# Altium PCB MIPI.PcbDoc
Units mil, origin at the board's own origin, x right, y up, seen from the top; angles counter-clockwise.
Board outline 2086.61 x 1456.69 mil, 2 copper layers (TOP, BOTTOM); 90 components, 80 nets, 454 pads, 143 vias.
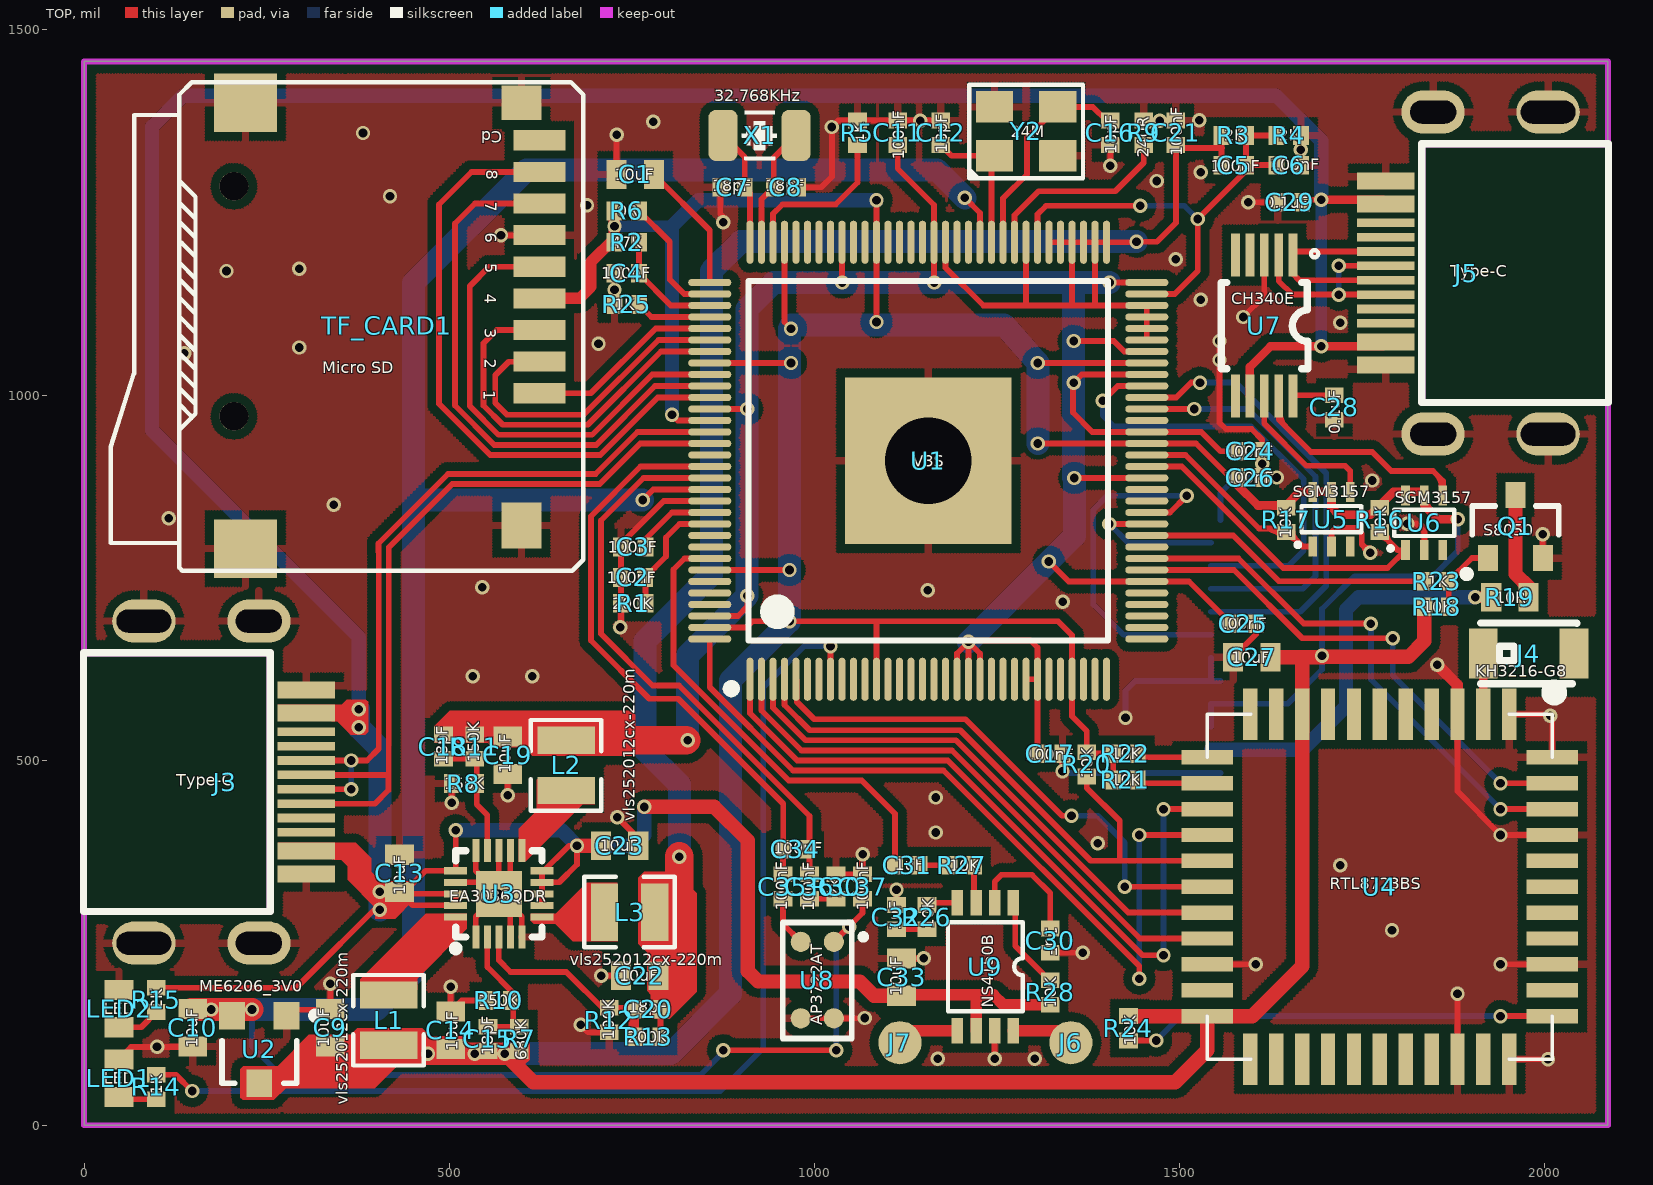
[diagram p0: TOP view]
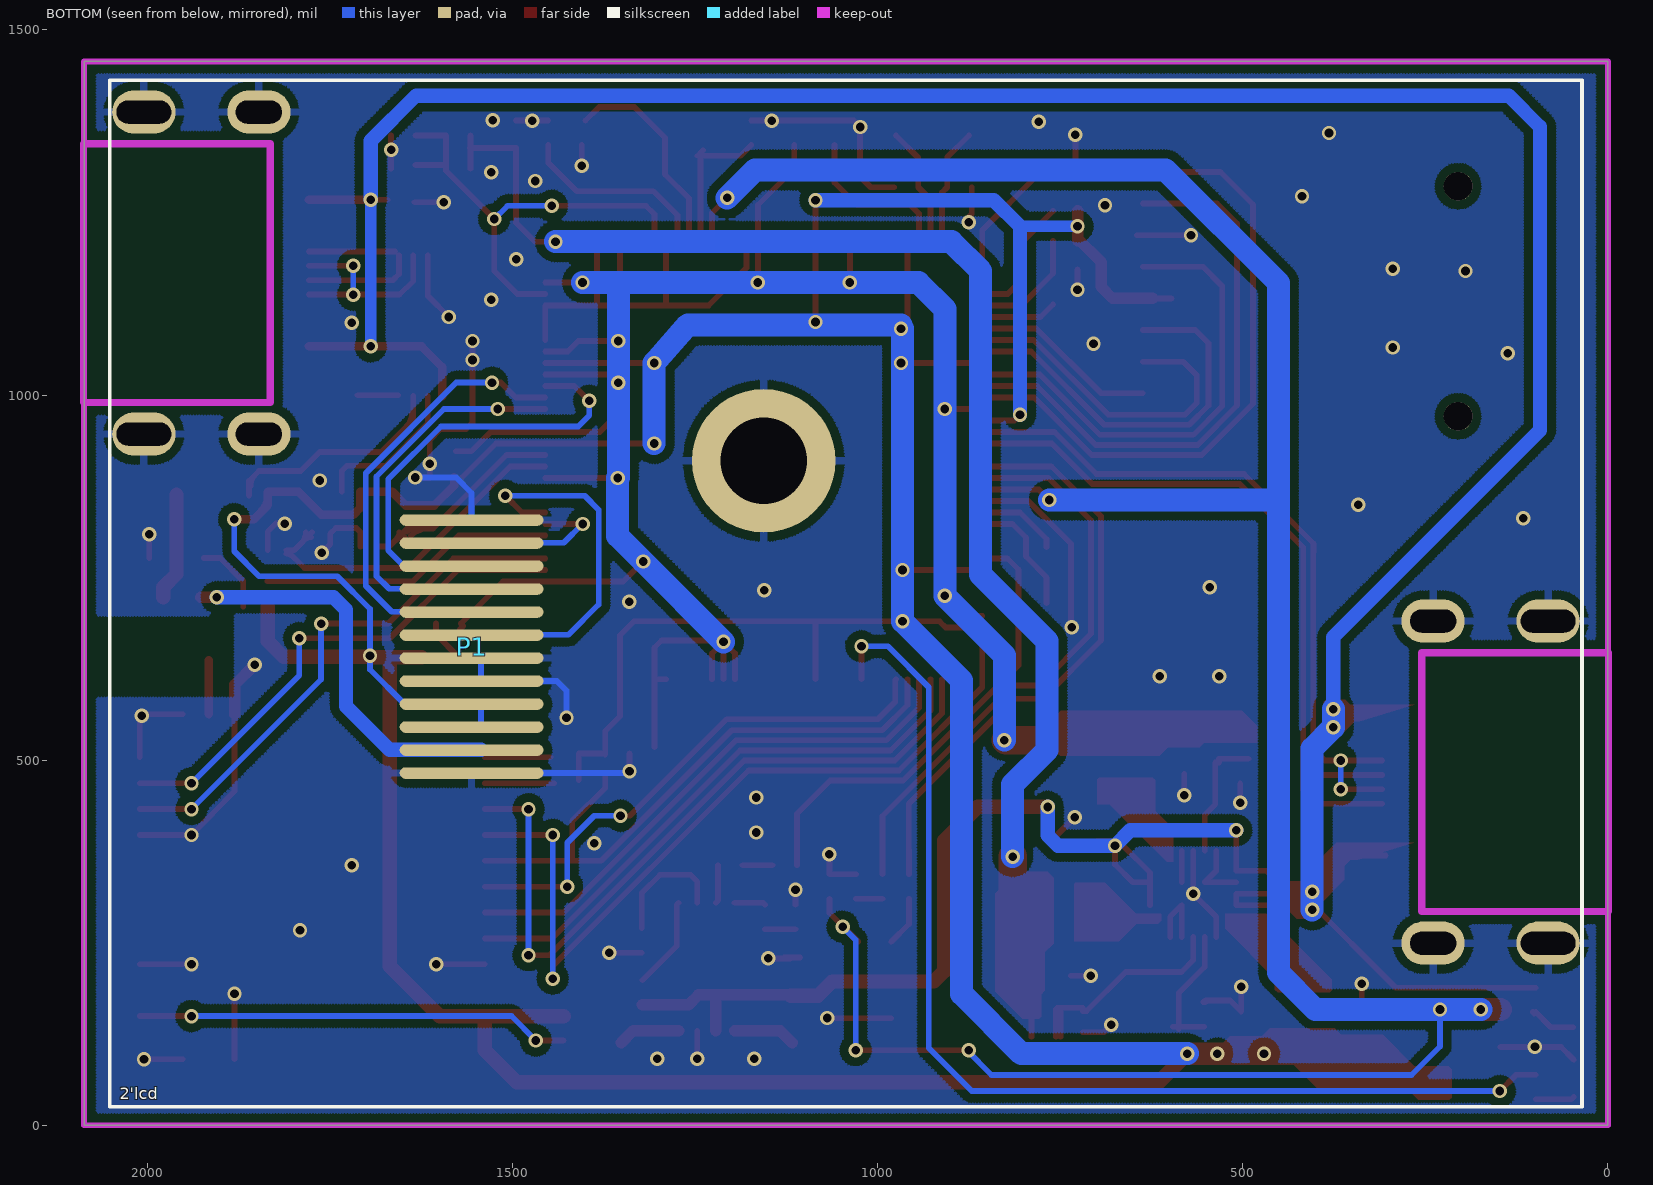
[diagram p1: BOTTOM view, seen from below]

## Layer stack, top to bottom
TOP: signal copper 1.4
Dielectric: core 12.6, FR-4, Dk 4.8
BOTTOM: signal copper 1.4

## Board outline
0,0 0,1456.69 2086.61,1456.69 2086.61,0

## Design rules (kind name [scope] priority, off if disabled: settings)
Clearance POLY [(INPolygon)] p1: gap=11.81
Clearance ALL [All] p2: gap=5.51
DiffPairsRouting DiffPair_DiffPairsRouting [InDifferentialPair ('NewDifferentialPair2')] p1: maxlimit=10 minlimit=10 mostfreqgap=10 maxuncoupledlength=500
DiffPairsRouting DiffPair_DiffPairsRouting_1 [InDifferentialPair ('NewDifferentialPair2')] p2: maxlimit=10 minlimit=10 mostfreqgap=10 maxuncoupledlength=500
DiffPairsRouting DiffPairsRouting_1 [InDifferentialPairClass('100RM')] p3: maxlimit=10 minlimit=10 mostfreqgap=10 maxuncoupledlength=500
DiffPairsRouting DiffPair_DiffPairsRouting_2 [InDifferentialPairClass('100RM')] p4: maxlimit=10 minlimit=10 mostfreqgap=10 maxuncoupledlength=500
DiffPairsRouting [All] p5: maxlimit=10 minlimit=5 mostfreqgap=10 toplayer_prefgap=5 bottomlayer_prefgap=5 maxuncoupledlength=500
HoleToHoleClearance [All] p1: gap=7.87 allowstackedmicrovias=TRUE
MatchedLengths DiffPair_MatchedLengths [InDifferentialPair ('NewDifferentialPair2')] p1: tolerance=1000 checknetsindiffpair=TRUE checkdiffpairvsdiffpair=TRUE checkothers=TRUE
MatchedLengths DiffPair_MatchedLengths_1 [InDifferentialPair ('NewDifferentialPair2')] p2: tolerance=1000 checknetsindiffpair=TRUE checkdiffpairvsdiffpair=TRUE checkothers=TRUE
MatchedLengths [InDifferentialPairClass('100RM')] p3: tolerance=1000 checknetsindiffpair=TRUE checkdiffpairvsdiffpair=TRUE checkothers=TRUE
MatchedLengths DiffPair_MatchedLengths_2 [InDifferentialPairClass('100RM')] p4: tolerance=1000 checknetsindiffpair=TRUE checkdiffpairvsdiffpair=TRUE checkothers=TRUE
MinimumSolderMaskSliver [All] p1: minsoldermaskwidth=7.87
PlaneClearance [All] p1: clearance=11.81
PlaneConnect [All] p1: planeconnectstyle=Direct reliefexpansion=20 reliefentries=4 reliefconductorwidth=10 reliefairgap=10
PolygonConnect [ISVIA] p1: connectstyle=Direct reliefconductorwidth=10 reliefentries=4 polygonreliefangle="90 Angle"
PolygonConnect POLY_ALL [All] p2: connectstyle=Relief reliefconductorwidth=10 reliefentries=4 polygonreliefangle="90 Angle"
RoutingVias [All] p1: holewidth=9.84 width=17.72 viastyle="Through Hole" minholewidth=7.87 minwidth=15.75 maxholewidth=19.68 maxwidth=31.5
SilkscreenOverComponentPads [All] p1: minsilkscreentomaskgap=10
SolderMaskExpansion [All] p1: expansion=4
TestPointUsage FabricationTestPointUsage [All] p1: valid=0 allowmultiple=FALSE
Testpoint FabricationTestpoint [(IsPad And (OnTopLayer Or OnBottomLayer))] p1: side=3 testpointundercomponent=TRUE minsize=40 maxsize=100 preferedsize=60 minholesize=0 maxholesize=40 preferedholesize=32 testpointgrid=1 style=297 order=0123456789
Width [All] p1: maxlimit=31.5 minlimit=5 preferedwidth=31.5
18 further rules are at their usual default settings.

## Components (designator, comment, footprint, x,y, rotation, side; value= is the part's Value field where it differs from the comment)
C1 "10uF" 0603 754.81,1302 r180 top
C2 "100nF" 0402 751.56,750.2 r0 top
C3 "100nF" 0402 752,792 r0 top
C4 "100nF" 0402 743,1166.67 r0 top
C5 "100nF" 0402 1574.32,1314.8 r180 top
C6 "100nF" 0402 1649.44,1314.8 r180 top
C7 "18pF" 0402 888,1284.5 r180 top
C8 "18pF" 0402 961,1284.5 r0 top
C9 "10uF" 0603 337,133.59 r90 top
C10 "10uF" 0603 149,133.59 r270 top
C11 "100nF" 0402 1114,1359 r270 top
C12 "18pF" 0402 1173,1359 r90 top
C13 "10uF" 0603 432,345 r270 top
C14 "10uF" 0603 502,130.22 r270 top
C15 "18pF" 0402 553,118.41 r270 top
C16 "18pF" 0402 1405,1359 r270 top
C17 "100nF" 0402 1323,509 r0 top
C18 "18pF" 0402 492.17,518.59 r90 top
C19 "10uF" 0603 580,506.78 r90 top
C20 "18pF" 0402 772.59,159 r0 top
C21 "100nF" 0402 1495,1359 r270 top
C22 "10uF" 0603 760.78,205 r0 top
C23 "10uF" 0603 733.22,383 r180 top
C24 "100nF" 0402 1596.54,923 r180 top
C25 "100nF" 0402 1587.19,687 r0 top
C26 "100nF" 0402 1596.54,887 r180 top
C27 "10uF" 0603 1599,641 r180 top
C28 "0.1uF" 0402 1712,983 r270 top
C29 "0.1uF" 0402 1651,1264 r0 top
C30 "1uF" 0402 1323,253 r270 top
C31 "1uF" 0402 1127.2,356.2 r180 top
C32 "1uF" 0402 1112.44,285.2 r90 top
C33 "10uF" 0603 1119.33,203 r90 top
C34 "100nF" 0402 974,378 r0 top
C35 "100nF" 0402 957,327 r90 top
C36 "100nF" 0402 993.33,327 r90 top
C37 "100nF" 0402 1066,327 r90 top
J3 "Type-C" USB-C-SMD_TYC-302-16 193.15,470 r270 top
J4 "KH3216-G8" ANT-SMD_L3.2-W1.6 1978,646 r0 top
J5 "Type-C" USB-C-SMD_TYC-302-16 1893.46,1167 r90 top
J6 "" TP-1.5 1351.2,113.2 r0 top
J7 "" TP-1.5 1117.2,113.2 r0 top
L1 "vls252012cx-220m" L1 417,144 r90 top
L2 "vls252012cx-220m" L1 660,493 r90 top
L3 "vls252012cx-220m" L1 747,292 r0 top
LED1 "LED" 0603 48,64.41 r90 top
LED2 "LED" 0603 48,160 r90 top
P1 "2'lcd" 2'LCD 1555.99,655.61 r0 bottom locked
Q1 "S8050" SOT23-3L 1960,820 r0 top
R1 "200K" 0402 752,715 r0 top
R2 "47K" 0402 743,1209.33 r0 top
R3 "2K" 0402 1574.32,1355.39 r180 top
R4 "2K" 0402 1649.44,1355.39 r180 top
R5 "1K" 0402 1059,1359 r270 top
R6 "0R" 0402 743,1252 r180 top
R7 "680K" 0402 596,118.41 r270 top
R8 "150K" 0402 520.24,468 r180 top
R9 "240R" 0402 1451,1359 r270 top
R10 "150K" 0402 567.76,171 r180 top
R11 "150K" 0402 535,518.59 r90 top
R12 "100K" 0402 719,144.24 r270 top
R13 "200K" 0402 772.59,121.24 r0 top
R14 "1K" 0402 99,52.6 r270 top
R15 "2K" 0402 99,171.81 r270 top
R16 "10K" 0402 1774,829 r270 top
R17 "10K" 0402 1646,829 r270 top
R18 "10K" 0402 1852,710 r0 top
R19 "10R" 0603 1952.41,723 r0 top
R20 "10K" 0402 1373,494.24 r270 top
R21 "10K" 0402 1426,473 r0 top
R22 "10K" 0402 1426,509 r0 top
R23 "1K" 0402 1852,745 r180 top
R24 "10K" 0402 1430,133 r90 top
R25 "1K" 0402 743,1124 r0 top
R26 "10K" 0402 1154.2,285.2 r270 top
R27 "10K" 0402 1201.7,356.2 r180 top
R28 "10K" 0402 1323,182 r270 top
R30 "2K" 0402 1029.67,327 r90 top
TF_CARD1 "Micro SD" "Micro SD" 220.98,1400 r270 top
U1 "V3S" LQFP-128 1156,910 r90 top
U2 "ME6206_3V0" SOT-23 240,109 r180 top
U3 "EA3036QDR" TQFN-20 568,317 r0 top
U4 "RTL8723BS" RTL8723BS 1538,563 r270 top
U5 "SGM3157" SOT363-6L 1708,830 r90 top
U6 "SGM3157" SOT363-6L 1835,825 r90 top
U7 "CH340E" MSOP-10 1616,1095 r180 top
U8 "AP3722AT" AP3722AT 1004,199 r0 top
U9 "NS4150B" MSOP8 1234.2,217.2 r270 top
X1 "32.768KHz" XT_3215_2 925,1355.5 r180 top
Y2 "24M" X3225 1290,1361 r0 top

## Footprints (in the part's own frame and the unit in brackets; to place one, negate y for a bottom-side part, rotate by r counter-clockwise, add the part's x,y. Pads: shape width x height; smd on the part's side, far side on the other; paste and mask are expansions set on the pad)
2'LCD [mm]
  oval 5x0.4 smd: 1(0,4.4) 2(0,3.6) 3(0,2.8) 4(0,2) 5(0,1.2) 6(0,0.4) 7(0,-0.4) 8(0,-1.2) 9(0,-2) 10(0,-2.8) 11(0,-3.6) 12(0,-4.4)
  silkscreen extent -38.62,-19.7 12.58,16
0402 [mm]
  rect 0.55x0.65 smd mask+0: 1(-0.425,0) 2(0.425,0)
0603 [mm]
  rect 0.7x1 smd mask+0: 1(-0.65,0) 2(0.65,0)
ANT-SMD_L3.2-W1.6 [mm]
  rect 1x1.75 smd: 1(-1.578,0) 2(1.578,0)
  silkscreen extent -1.68,-1.05 1.68,1.06
AP3722AT [mm]
  round 0.7 smd: 1(0.575,1.33) 2(0.575,-1.33) 3(-0.575,-1.33) 4(-0.575,1.33)
  silkscreen extent -1.2,-2.03 1.7,2
L1 [mm]
  rect 0.95x2 smd mask+0: 1(-0.875,0) 2(0.875,0)
  silkscreen extent -1.58,-1.22 1.58,1.23
LQFP-128 [mm]
  oval 1.5x0.25 smd: 1(-7.6,6.2) 2(-7.6,5.799) 3(-7.6,5.4) 4(-7.6,5.001) 5(-7.6,4.6) 6(-7.6,4.201) 7(-7.6,3.8) 8(-7.6,3.401) 9(-7.6,3) 10(-7.6,2.601) 11(-7.6,2.2) 12(-7.6,1.801) 13(-7.6,1.4) 14(-7.6,1.001) 15(-7.6,0.599) 16(-7.6,0.201) 17(-7.6,-0.201) 18(-7.6,-0.599) 19(-7.6,-1.001) 20(-7.6,-1.4) 21(-7.6,-1.801) 22(-7.6,-2.2) 23(-7.6,-2.601) 24(-7.6,-3) 25(-7.6,-3.401) 26(-7.6,-3.8) 27(-7.6,-4.201) 28(-7.6,-4.6) 29(-7.6,-5.001) 30(-7.6,-5.4) 31(-7.6,-5.799) 32(-7.6,-6.2) 65(7.6,-6.2) 66(7.6,-5.799) 67(7.6,-5.4) 68(7.6,-5.001) 69(7.6,-4.6) 70(7.6,-4.201) 71(7.6,-3.8) 72(7.6,-3.401) 73(7.6,-3) 74(7.6,-2.601) 75(7.6,-2.2) 76(7.6,-1.801) 77(7.6,-1.4) 78(7.6,-1.001) 79(7.6,-0.599) 80(7.6,-0.201) 81(7.6,0.201) 82(7.6,0.599) 83(7.6,1.001) 84(7.6,1.4) 85(7.6,1.801) 86(7.6,2.2) 87(7.6,2.601) 88(7.6,3) 89(7.6,3.401) 90(7.6,3.8) 91(7.6,4.201) 92(7.6,4.6) 93(7.6,5.001) 94(7.6,5.4) 95(7.6,5.799) 96(7.6,6.2)
  oval 0.25x1.5 smd: 33(-6.2,-7.6) 34(-5.799,-7.6) 35(-5.4,-7.6) 36(-5.001,-7.6) 37(-4.6,-7.6) 38(-4.201,-7.6) 39(-3.8,-7.6) 40(-3.401,-7.6) 41(-3,-7.6) 42(-2.601,-7.6) 43(-2.2,-7.6) 44(-1.801,-7.6) 45(-1.4,-7.6) 46(-1.001,-7.6) 47(-0.599,-7.6) 48(-0.201,-7.6) 49(0.201,-7.6) 50(0.599,-7.6) 51(1.001,-7.6) 52(1.4,-7.6) 53(1.801,-7.6) 54(2.2,-7.6) 55(2.601,-7.6) 56(3,-7.6) 57(3.401,-7.6) 58(3.8,-7.6) 59(4.201,-7.6) 60(4.6,-7.6) 61(5.001,-7.6) 62(5.4,-7.6) 63(5.799,-7.6) 64(6.2,-7.6) 97(6.2,7.6) 98(5.799,7.6) 99(5.4,7.6) 100(5.001,7.6) 101(4.6,7.6) 102(4.201,7.6) 103(3.8,7.6) 104(3.401,7.6) 105(3,7.6) 106(2.601,7.6) 107(2.2,7.6) 108(1.801,7.6) 109(1.4,7.6) 110(1.001,7.6) 111(0.599,7.6) 112(0.201,7.6) 113(-0.201,7.6) 114(-0.599,7.6) 115(-1.001,7.6) 116(-1.4,7.6) 117(-1.801,7.6) 118(-2.2,7.6) 119(-2.601,7.6) 120(-3,7.6) 121(-3.401,7.6) 122(-3.8,7.6) 123(-4.201,7.6) 124(-4.6,7.6) 125(-5.001,7.6) 126(-5.4,7.6) 127(-5.799,7.6) 128(-6.2,7.6)
  rect 5.8x5.8 smd: 129(0,0)
  silkscreen extent -8.07,-6.25 6.25,7
"Micro SD" [mm]
  rect 2.032x2.2 smd: 0(0,0) 0(15.5,0)
  rect 1.2x1.4 smd: 0(0,9.6)
  round 1 hole 1 unplated: 0(2.9,-0.4) 0(10.9,-0.4)
  rect 1.6x1.4 smd: 0(14.7,9.6)
  rect 0.7x1.8 smd: 1(10.1,10.227) 2(9,10.227) 3(7.9,10.227) 4(6.8,10.227) 5(5.7,10.227) 6(4.6,10.227) 7(3.5,10.227) 8(2.4,10.227) 9(1.3,10.227)
  silkscreen extent -0.72,-4.68 16.27,11.75
MSOP8 [mm]
  rect 0.9x0.4 smd mask+0: 1(-2.225,0.975) 2(-2.225,0.325) 3(-2.225,-0.325) 4(-2.225,-0.975) 5(2.225,-0.975) 6(2.225,-0.325) 7(2.225,0.325) 8(2.225,0.975)
  silkscreen extent -1.55,-1.3 1.55,1.3
MSOP-10 [mil]
  rect 12x59.06 smd: 1(-39.37,-96.5) 2(-19.68,-96.5) 3(0,-96.5) 4(19.69,-96.5) 5(39.37,-96.5) 6(39.37,96.5) 7(19.69,96.5) 8(0,96.5) 9(-19.68,96.5) 10(-39.37,96.5)
  silkscreen extent -74,-103 59,59
RTL8723BS [mm]
  rect 1.8x0.5 smd: 1(0,10.5) 2(0,9.6) 3(0,8.7) 4(0,7.8) 5(0,6.9) 6(0,6) 7(0,5.1) 8(0,4.2) 9(0,3.3) 10(0,2.4) 11(0,1.5) 23(12,1.5) 24(12,2.4) 25(12,3.3) 26(12,4.2) 27(12,5.1) 28(12,6) 29(12,6.9) 30(12,7.8) 31(12,8.7) 32(12,9.6) 33(12,10.5)
  rect 0.5x1.8 smd: 12(1.5,0) 13(2.4,0) 14(3.3,0) 15(4.2,0) 16(5.1,0) 17(6,0) 18(6.9,0) 19(7.8,0) 20(8.7,0) 21(9.6,0) 22(10.5,0) 34(10.5,12) 35(9.6,12) 36(8.7,12) 37(7.8,12) 38(6.9,12) 39(6,12) 40(5.1,12) 41(4.2,12) 42(3.3,12) 43(2.4,12) 44(1.5,12)
  silkscreen extent -0.95,0 12,12.26
SOT23-3L [mm]
  rect 0.7x0.9 smd: 1(-0.95,-1.1) 2(0.95,-1.1) 3(0,1.1)
  silkscreen extent -1.82,-1.78 1.5,0.71
SOT363-6L [mm]
  rect 0.7x0.3 smd: 1(-0.95,0.65) 2(-0.95,0) 3(-0.95,-0.65) 4(0.95,-0.65) 5(0.95,0) 6(0.95,0.65)
  silkscreen extent -0.97,-1.04 0.46,1.24
SOT-23 [mm]
  rect 0.9x0.95 smd: 1(-0.95,-1.048) 2(0.95,-1.048) 3(0,1.302)
  silkscreen extent -2.07,-1.17 1.3,1.3
TP-1.5 [mm]
  round 1.5 smd: 1(0,0)
TQFN-20 [mil]
  rect 9.84x31.49 smd: 1(-31.51,-59.05) 2(-15.76,-59.05) 3(-0.01,-59.05) 4(15.74,-59.05) 5(31.49,-59.05) 11(31.49,59.06) 12(15.74,59.06) 13(-0.01,59.06) 14(-15.76,59.06) 15(-31.51,59.06)
  rect 31.5x9.84 smd: 6(59.05,-31.5) 7(59.05,-15.75) 8(59.05,0) 9(59.05,15.75)
  rect 31.49x9.84 smd: 10(59.05,31.5) 16(-59.05,31.5) 17(-59.05,15.75) 18(-59.05,0) 19(-59.05,-15.75) 20(-59.05,-31.5)
  rect 63x63 smd: 21(-0.01,0)
  silkscreen extent -63,-79 59,59
USB-C-SMD_TYC-302-16 [mm]
  oval 1.5x2.2 hole 0.8 slot 1.6 at 90 deg: 0(-5.6,1.175) 0(5.6,1.175)
  rect 0.3x2 smd: 1(-3.35,2.825) 1(-3.05,2.825) 2(-2.55,2.825) 2(-2.25,2.825) 3(-1.75,2.825) 4(-1.25,2.825) 5(-0.75,2.825) 6(-0.25,2.825) 7(0.25,2.825) 8(0.75,2.825) 9(1.25,2.825) 10(1.75,2.825) 11(2.25,2.825) 11(2.55,2.825) 12(3.05,2.825) 12(3.35,2.825)
  oval 1.5x2.2 hole 0.8 slot 1.9 at 90 deg: 13(-5.6,-2.825) 13(5.6,-2.825)
  Keep-Out Layer lines w0.254: 4.5,-4.925 4.5,1.575 -4.5,1.575 -4.5,-4.925 4.5,-4.925
  silkscreen extent -4.5,-4.93 4.5,1.58
X3225 [mm]
  rect 1.3x1.1 smd mask+0: 1(-1.1,-0.85) 2(1.1,-0.85) 3(1.1,0.85) 4(-1.1,0.85)
  silkscreen extent -1.97,-1.63 1.97,1.63
XT_3215_2 [mil]
  rrect50% 40x70 smd: 1(-50,0) 2(50,0)
  silkscreen extent -24,-34 24,34

## Part data
C1 C2 C3 C4 C5 C6 C7 C8 C9 C10 C11 C12 C13 C14 C15 C16 C17 C18 C19 C20 C21 C22 C23 C24 C25 C26 C27 C28 C29 C30 C31 C32 C33 C34 C35 C36 C37: library part C
J3 J5: library part Type-C_12pin
J4 J6 J7: library part TEST-POINT, "测试点"
L1 L2 L3: library part L-CDRH, "功率屏蔽电感"
Q1: library part 8050-SMD, "高频放大-NPN型"
R1 R2 R3 R4 R5 R6 R7 R8 R9 R10 R11 R12 R13 R14 R15 R16 R17 R18 R19 R20 R21 R22 R23 R24 R25 R26 R27 R28 R30: library part R
TF_CARD1: "Micro SD卡"
U2: library part ME6206
U5 U6: "单路双掷模拟开关"
U7: "USB2UART"
X1: library part XTAL-2P, "2脚无源晶振"
Y2: library part "SMD XTAL"

## Free pads (board coordinates)
  round 196.85 hole 118.11: 0(1156,910)

## Via types
v1: diameter 19.68, hole 11.81, TOP to BOTTOM, tented both sides, 143 vias

## Nets (pads, with @x,y where several pads share a name; then routed paths per layer and width w, separated by ;. In a path a pad name is that pad's centre, name@x,y a point inside that pad or via, vN(x,y) a via of type N, cw(c..) or ccw(c..) an arc to the next point about the centre after c; other vN are vias at no path point)
+1.2V: C11.2 C17.1 C18.2 C19.2 C24.2 C25.1 L2.2 R11.2 U1.19 U1.20 U1.21 U1.25 U1.26 U1.38 U1.47 U1.51 U1.56 U1.58 U1.64 U1.80 U1.88 U1.108 U1.126 | length 3803.9
  TOP w7.87: C18.2 R11.2 652.13,535.32 L2.2 ; v1@826.55,525 v1@829,525 ; U1.126 895.38,697.4 907.98,710 v1(907.98,725) ; U1.108 v1(907.98,980.9) ; U1.88 1037.9,1158.02 1038,1157.92 v1(1038,1154.1) ; C11.2 1114,1310 1163.9,1260.1 U1.80 v1@1163.9,1154.1 ; U1.19 1195.4,646.28 v1(1211.1,661.98) ; U1.20 v1(1211.1,661.98) ; v1@1213.06,663.94 1296,663.94 1305.6,654.34 U1.26 ; U1.21 1226.9,646.18 v1(1211.1,661.98) ; U1.25 U1.26 ; C17.1@1305.6,517.67 U1.26 ; v1(1321,772) 1348.4,744.6 U1.38 1512.86,744.6 C25.1 ; v1@1354.01,1016.01 1354.01,975.99 1380.6,949.4 U1.51 1529.6,949.4 1556,923 C24.2@1577.54,923 ; v1(1355,1017) 1366.1,1028.1 U1.56 1424.12,1028.1 ; v1(1355,1074) 1410.02,1074 1424.42,1059.6 U1.58 ; v1(1356,886.4) U1.47 ; v1(1404.02,1154.1) U1.64 ; C25.1@1567.36,683.91 C25.1@1572.27,679
  TOP w39.37: L2.2 v1@824.1,527.45
  BOTTOM w7.87: v1(826.55,527.45) 829,525 v1@829,527.45 ; v1@1355,886.4 v1@1355,887.4
  BOTTOM w31.5: v1(826.55,527.45) 826.55,643.57 v1(907.98,725) v1(907.98,980.9) 907.98,1117.98 944.1,1154.1 v1(1038,1154.1) v1(1164,1154.1) 1355,1154.1 ; v1(1211.1,661.98) 1211.1,662.1 v1(1321,772) 1356,807 v1(1356,886.4) 1355,887.4 v1(1355,1017) v1(1355,1074) 1355,1154.1 ; v1(1404.02,1154.1) 1355,1154.1
+1.8V: C5.2 C20.2 C21.2 C22.2 L3.2 R3.2 R13.2 U1.59 U1.60 U1.61 U1.62 U1.65 U1.66 U1.67 U1.68 U1.69 U1.70 U1.72 U1.79 | length 2748.4
  TOP w7.87: L3.2@787.59,285.86 786.37,284.64 C22.2 789.32,202.05 C20.2 R13.2 ; U1.79 1179.6,1174.4 1231.4,1122.6 U1.62 U1.61 U1.60 U1.59 ; 1289.9,1122.6 U1.72 ; U1.70 U1.69 U1.68 ; 1352.9,1122.6 U1.68 ; 1384.3,1122.6 U1.66 ; C5.2@1557.59,1309.8 R3.2 ; 1558,1338.27 1495,1338.27 1495,1236 1469,1210 v1(1441,1210) 1440.2,1209.2 U1.65 U1.66 ; U1.68 U1.67 U1.66
  TOP w39.37: L3.2 815,325.55 v1(815,368)
  BOTTOM w31.5: v1(815,368) 815,467 768,514 768,663 859,754 859,1170 899,1210 v1(1441,1210)
+3.0V: C10.1 C37.1 U1.76 U1.115 U2.2 U8.1 | length 3769.5
  TOP w7.87: v1(765,856.2) 779.4,870.6 U1.115 ; v1(875,103) v1(1030,103) ; U8.1 1066,290.72 C37.1 ; v1(1206,1270) 1226.9,1249.1 U1.76
  TOP w31.5: C10.1@147,158.59 v1(174,158.59) v1(230,158.59)
  BOTTOM w7.87: v1(230,158.59) 230,108 269,69 844,69 878,103 v1(875,103) ; v1(1030,103) 1030,254 v1(1048,272)
  BOTTOM w31.5: v1(174,158.59) v1(230,158.59) 400.59,158.59 451,209 451,1153.34 605.66,1308 1168,1308 v1(1206,1270) ; 461.2,856.2 v1(765,856.2)
+3.3V: C9.1 C14.2 C15.2 C26.2 C27.1 L1.1 P1.3 P1.4 R2.1 R6.2 R7.2 R16.1 R17.1 R18.1 R20.1 R21.1 R22.1 R24.2 TF_CARD1.4 U1.12 U1.29 U1.50 U1.57 U1.85 U1.93 U1.104 U1.109 U1.122 U1.127 U2.3 U4.9 U4.22 U5.5 U5.6 U6.5 U6.6 | length 7451
  TOP w7.87: TF_CARD1.4@597.64,1132.28 TF_CARD1.4 ; v1(805,973.02) 812.92,965.1 U1.109 U1.109@831.2,965.1 ; U1.127 906.7,681.7 915.1,690.1 v1(966,690.1) 1085.1,690.1 ; U1.122 v1(966,760.4) ; U1.104 v1(968,1043.9) ; U1.93 959.1,1099.9 v1(968,1091) ; U1.12 1085.1,690.1 ; v1@1085.1,1100 U1.85 v1(1085.1,1266.9) ; v1(1306,933.6) U1.50 1522.4,933.6 C26.2@1569,887 ; v1(1306,1043.9) U1.57 ; R20.1@1373,507.73 1374.27,509 R22.1 R21.1 ; R20.1 1373,540 1352.9,560.1 U1.29 1352.9,671.1 1333.9,690.1 1085.1,690.1 ; R18.1 R18.1@1838,707.27
  TOP w11.81: C26.2 1579.8,876.2 1607.27,848.73 1646,848.73 1664.67,867.4 U5.6 U5.5 1708,846 1718,836 1761.47,836 1792.87,867.4 1835,867.4 1835,849 1854,830 v1(1881,830) ; U6.5@1835,859.53 ccw(c1860.42,859.53) 1842.44,841.56
  TOP w15.75: TF_CARD1.4 678.28,1132.28 694,1148 694,1182 726.27,1214.27 v1(726.27,1231) ; R2.1@726.27,1211 v1(726.27,1231) ; R6.2 v1(726.27,1231)
  TOP w19.68: v1(576,98.27) 615.27,59 1494,59 1538,103 U4.22 ; R24.2@1430,149.61 U4.22 ; C27.1 1667.92,641 ; v1(1695,643) v1@1696.59,641.41 ; R18.1 1835.27,663.27 1813.41,641.41 v1@1696.59,641.41 ; U4.22 1599.61,149.61 1667.92,217.92 U4.9 1667.92,641 ; 1667.92,641 1697,641 v1@1696.59,641.41
  BOTTOM w7.87: P1.3@1543,545.76 1543,577.26 1648.26,577.26 1695,624 v1(1695,643) 1695,707.21 1739.79,752 1847,752 1881,786 v1(1881,830)
  BOTTOM w15.75: v1(726.27,1231) 805,1231
  BOTTOM w19.68: v1(805,973.02) 805,1231 840.9,1266.9 v1(1085.1,1266.9)
  BOTTOM w31.5: v1(576,98.27) 803.27,98.27 885,180 885,609.1 v1(966,690.1) v1(966,760.4) v1@966,1091 ; v1@968,1096 1259.9,1096 v1(1306,1043.9) v1(1306,933.6)
  other v1: 471,98.27 535,98.27 1085,1100
+5V: C13.2 C23.2 C29.2 C33.1 J3.2 J3.11 J5.2 J5.11 R15.1 R28.2 U3.7 U3.8 U3.9 U3.10 U3.16 U3.18 U3.19 U7.7 U9.6 | length 5764.8
  TOP w7.87: R15.1 290.54,188.54 C13.2@413.5,311.5 ; J3.11@304.37,369.61 365.39,369.61 370,365 370,340 390,320 v1(405,320) 382,343 382,369 369.58,381.42 J3.11@309.22,381.42 ; C13.2 450.16,301.25 U3.19 U3.18 C13.2@438.41,317 ; C13.2@438.41,319.41 467.5,348.5 U3.16 v1(508.95,403.94) ; U3.7 U3.8 U3.9 ; C29.2@1671.12,1267.39 v1(1694,1267.39) ; U3.9 650.75,332.75 675,357 v1(675,383) 664,383 627.05,346.06 U3.9
  TOP w11.81: U7.7 1596.31,1038.31 1624.61,1066.61 v1(1694,1066.61) J5.2@1778.78,1066.61 ; v1(1694,1267.39) J5.11@1778.78,1267.39
  TOP w15.75: C33.1@1119.33,178.61 1221.41,178.61 ; U9.6 1221.41,178.61 ; R28.2@1322,165.27 1258.73,165.27 1245.39,178.61 1221.41,178.61
  TOP w19.68: v1(675,383) C23.2@699.41,383 ; v1(767,436) 863,436 909,390 909,211 923,197 1062,197 1081.59,177.41 C33.1
  BOTTOM w15.75: v1(1694,1066.61) v1(1694,1267.39)
  BOTTOM w19.68: v1(376,570) 376,668.59 93,951.59 93,1367.1 135.93,1410.03 1631.97,1410.03 1694,1347.99 v1(1694,1267.39) ; v1(508.95,403.94) 654.05,403.94 v1(675,383) 753,383 767,397 v1(767,436)
  BOTTOM w31.5: v1(376,570) v1(376,545) 405,516 v1(405,320) v1(405,295)
CH340_RXD: U6.4 U7.9 | length 349.4
  TOP w7.87: U7.9 1635.68,966.32 1680,922 1764,922 1790,896 1847,896 1860.59,882.41 U6.4 ; U7.9@1637.74,974.97 ccw(c1663.61,974.97) 1645.32,956.68 ; 1852.19,890.81 cw(c1836.65,875.28) U6.4@1858.62,875.28
CH340_TXD: U5.4 U7.8 | length 210.9
  TOP w7.87: U7.8 1616,961 1674,903 1727,903 1733.59,896.41 U5.4
D+: J5.6 J5.8 U7.1 | length 271.2
  TOP w7.87: U7.1 1655.37,1165.63 1663.84,1157.16 J5.6@1778.78,1157.16 ; U7.1@1660.4,1196.53 J5.8@1778.78,1196.53
D-: J5.5 J5.7 U7.2 | length 286.1
  TOP w7.87: U7.2 1635.68,1156.32 1654.53,1137.47 v1(1718.16,1137.47) J5.5@1778.78,1137.47 ; v1(1718.16,1176.84) J5.7@1778.78,1176.84
  BOTTOM w7.87: v1(1718.16,1137.47) v1(1718.16,1176.84)
GND: C1.2 C2.1 C3.1 C4.1 C6.1 C7.2 C8.2 C9.2 C10.2 C11.1 C12.2 C13.1 C14.1 C16.2 C17.2 C19.1 C21.1 C22.1 C23.1 C24.1 C25.2 C26.1 C27.2 C28.2 C29.1 C30.2 C32.2 C33.2 C37.2 J3.0 J3.1 J3.12 J3.13 J5.0 J5.1 J5.12 J5.13 LED1.2 LED2.2 P1.1 P1.5 P1.6 P1.12 pad.0 Q1.2 R1.1 R4.1 R5.1 R8.2 R9.1 R10.2 R12.2 R25.1 R30.2 TF_CARD1.0@220.98,789.76 TF_CARD1.0@220.98,1400 TF_CARD1.0@598.94,821.26 TF_CARD1.0@598.94,1400 TF_CARD1.6 U1.116 U1.129 U2.1 U3.1 U3.4 U3.5 U3.12 U3.13 U3.15 U3.17 U3.21 U4.1 U4.3 U4.20 U4.31 U4.33 U4.36 U4.41 U4.44 U5.2 U6.2 U7.3 U8.2 U8.3 U9.7 Y2.2 Y2.4 | length 3976.9
  TOP w7.87: LED1.2@47,90 47.5,90.5 64.41,107.41 C10.2@147,107.41 ; U2.1@275.4,158.26 334.67,158.26 C9.2@335,158.59 ; C9.2 v1(337,194) ; v1(502,190) C14.1 517.19,171 R10.2 ; v1(503.5,441.5) R8.2 ; U3.17 552.24,332.75 536.49,348.5 U3.15 ; U3.1 536.49,285.5 v1(567.99,317) U3.13 ; R10.2@551.03,169 R10.2@554.27,169 ; v1(571,1218.9) TF_CARD1.6 ; v1(580,452) C19.1 ; U3.4 583.74,301.25 599.49,285.5 U3.5 ; U3.21@583.74,332.75 U3.12 ; TF_CARD1.6@597.64,1218.9 TF_CARD1.6 ; TF_CARD1.6@644.9,1218.9 TF_CARD1.6 ; v1(680,138) 690.5,127.5 R12.2 ; v1(708,205) C22.1 ; v1(726.27,1144.27) C4.1@726.27,1172 ; C1.2@728,1302 C1.2 v1(729.22,1356.22) ; v1(730,422) 758.81,393.19 C23.1 ; v1@735.27,683.27 R1.1 C3.1 735.27,796.27 793.9,854.9 U1.116 ; C7.2 871.27,1247.73 878,1241 875,1238 v1(875,1236.8) ; C8.2 1009.5,1284.5 1024,1299 v1(1024,1367) 1032.73,1375.73 R5.1 C11.1 C12.2 ; U8.3 U8.2 v1@1068.64,146.64 ; R30.2 C37.2 v1(1066,371) ; C33.2@1106.2,229.8 C33.2@1127.8,229.8 ; C32.2 v1(1112.44,322.44) ; C33.2 v1(1149.82,228.59) ; v1(1247,91.13) U9.7 ; C30.2 v1(1367.45,236.27) ; v1(1339.73,484.73) C17.2 ; v1(1405,1314) C16.2 ; R9.1 C21.1 ; U4.20 v1(1604.48,220.48) ; v1(1554.76,1074) 1554.76,962.06 1563.49,953.33 1598.7,953.33 1613.27,938.77 C24.1 ; C27.2 1604.73,672.32 C25.2@1604.73,687 ; v1(1587,1106.88) 1616,1135.88 U7.3 ; v1(1594,1264) C29.1 ; C24.1@1613.27,920.73 C26.1 v1(1633,887) ; C6.1@1666.17,1309.8 R4.1 ; U5.2 1708,812 1714,818 1741.79,818 1749.34,810.45 1749.34,795.66 v1(1761,784) ; v1@1755.09,784 ccw(c1740.84,784) 1750.92,794.08 ccw(c1761,804.16) v1@1761,789.91 ; v1(1812,824) 1824,824 1835,813 U6.2 ; U4.31 v1(1880.52,180) ; U4.3 1880.52,457.48 v1(1939.48,397.65) U4.41 ; v1(1939.48,220.48) U4.36 ; U4.33 v1(2004.44,90.56) ; U4.1 2005,563 2010.44,557.56 U4.44 ; Q1.2 v1(1997.4,809.6)
  TOP w15.75: v1(1853,630.5) 1880.52,602.98 U4.3
  BOTTOM w7.87: v1(1339.73,484.73) 1342.09,482.38 P1.1 ; v1(1426,558) 1426,595 1439.36,608.36 P1.5 ; P1.5@1543,608.76 P1.6@1543,640.25 ; P1.12 1555.99,865.99 1577,887 v1(1633,887)
  other v1: 1169,91.13 1302,91.13 100,107.41 1069,147 1790.98,267 1720.11,356 1388,386.41 1166,401 1166,449 2007.51,561 532,614.75 613.81,615 734,682 1340,717.11 1155,732.86 545,736.8 116,831.29 342.16,850 1764,883 1613.27,906 1554.76,1048 137.44,1057 294.92,1065 704.36,1070 1720.11,1099 1529,1130.5 195,1169.87 294.92,1173 1495,1186 688.62,1260 419,1272.23 1469,1293 1529,1305 1666.17,1336 382,1358.84 779.17,1374 1145,1375.73 1473,1375.73 1527.2,1376
HPOUTL: C31.2 U1.121 | length 645.1
  TOP w7.87: U1.121 822.1,776.1 807,761 807,630 964.9,472.1 1064.9,472.1 1110.47,426.53 C31.2
HPOUTR: U1.120
LCD_BK: P1.2 R19.1 | length 547.6
  TOP w15.75: v1(1905,723) R19.1
  BOTTOM w19.68: P1.2@1543,514.27 1668.27,514.27 1728,574 1728,706 1745,723 v1(1905,723)
LCD_BL: R23.2 U1.42 | length 496.2
  TOP w7.87: 1545.4,807.6 U1.42 1573.4,807.6 1636,745 R23.2
LCD_DC: P1.7 U1.44 | length 508.2
  TOP w7.87: U1.44 1487.1,839.1 v1(1510,862)
  BOTTOM w7.87: v1(1510,862) 1401,862 1382,843 1382,713 1423.25,671.75 P1.7@1543,671.75
LCD_RES: P1.11 U1.43 | length 200.8
  TOP w7.87: v1(1404,823.4) U1.43
  BOTTOM w7.87: v1(1404,823.4) 1429.67,797.73 P1.11@1543,797.73
LED1: R14.1 U1.8 | length 1519
  TOP w7.87: R14.1 125.67,69.33 v1(148,47) ; U1.8 v1(1022.1,655.9)
  BOTTOM w7.87: v1(148,47) 871,47 930,106 930,600 985.9,655.9 v1(1022.1,655.9)
MICIN1N: C34.2 C36.2 U1.114 | length 797.1
  TOP w7.87: U1.114 765.89,886.4 707.78,828.29 707.78,673.15 778.54,602.39 814.61,602.39 993.33,423.67 C36.2
MICIN1P: C34.1 C35.2 U1.113 | length 813.2
  TOP w7.87: U1.113 762.1,902.1 694,834 694,664 774,584 813.51,584 957.27,440.25 C34.1 ; C35.2 C34.1@957,377.73
NetC7_1: C7.1 U1.96 X1.2 | length 161.6
  TOP w7.87: X1.2 904.73,1325.77 C7.1 911.9,1277.33 U1.96
NetC8_1: C8.1 U1.95 X1.1 | length 165.9
  TOP w7.87: U1.95 927.7,1267.93 C8.1 944.27,1324.77 X1.1
NetC15_1: C15.1 R7.1 R10.1 U3.2 | length 183.6
  TOP w7.87: U3.2 552.24,216.76 587.73,181.27 R7.1@587.73,132 ; C15.1 R7.1
NetC18_1: C18.1 R8.1 R11.1 U3.14 | length 172.2
  TOP w7.87: C18.1 R11.1@532.61,501.86 ; R11.1@532.61,496.71 537.76,496.71 537.76,439.24 552.24,424.76 U3.14
NetC20_1: C20.1 R12.1 R13.1 U3.3 | length 322.5
  TOP w7.87: U3.3 567.99,226.01 584,210 660.39,210 713.83,156.56 R12.1@719,156.56 ; R12.1 753.89,160.97 C20.1 R13.1 ; R13.1@749.71,121.24 C20.1@749.71,156.56
NetC28_1: C28.1 U7.10 | length 55.4
  TOP w7.87: U7.10@1656.6,999.73 C28.1
NetC30_1: C30.1 U9.2 | length 167.5
  TOP w7.87: U9.2 1247,334 1256,343 1298,343 1323,318 C30.1
NetC31_1: C31.1 R27.2 | length 41
  TOP w7.87: C31.1 R27.2
NetC32_1: C32.1 R26.2 | length 41.8
  TOP w7.87: C32.1 R26.2
NetC35_1: C35.1 U8.4 | length 69
  TOP w7.87: C35.1 957,275.72 U8.4
NetC36_1: C36.1 R30.1 | length 36.3
  TOP w7.87: C36.1 R30.1
NetJ4_1: J4.1 U4.2 | length 74
  TOP w11.81: U4.2 J4.1@1915.95,636.95
NetJ6_1: J6.1 U9.8 | length 85.4
  TOP w15.75: U9.8 1334.8,129.61 J6.1
NetJ7_1: J7.1 U9.5 | length 85.4
  TOP w15.75: J7.1 1133.61,129.61 U9.5
NetL1_2: L1.2 U3.20 | length 145.1
  TOP w7.87: L1.2 508.95,270.39 U3.20
NetL2_1: L2.1 U3.11 | length 107.6
  TOP w7.87: U3.11 660,436.56 L2.1
NetL3_1: L3.1 U3.6 | length 79
  TOP w7.87: U3.6 L3.1@706.05,285.5
NetLED1_1: LED1.1 R14.2 | length 53.2
  TOP w7.87: LED1.1@47,38.82 49.95,35.87 R14.2
NetLED2_1: LED2.1 R15.2 | length 62.4
  TOP w7.87: LED2.1 78.33,134.41 R15.2 ; R15.2@101,153.08 R15.2@103,155.08
NetQ1_1: Q1.1 R18.2 R23.1 | length 102
  TOP w7.87: R18.2 R23.1 1900.42,776.69 Q1.1
NetQ1_3: Q1.3 R19.2 | length 147.8
  TOP w19.68: Q1.3 1960,755 1978,737 R19.2
NetR5_2: R5.2 U1.94 | length 223.6
  TOP w7.87: U1.94 943.4,1248.17 956.23,1261 1006,1261 1029,1261 1059,1291 R5.2
NetR21_2: R21.2 U4.13 | length 130.3
  TOP w7.87: R21.2@1443.22,468.51 U4.13 1502.51,468.51
NetR22_2: R22.2 U4.12 | length 130.3
  TOP w7.87: R22.2@1447.79,503.94 U4.12 1497.94,503.94
NetR24_1: R24.1 U4.34 | length 597.3
  TOP w7.87: R24.1 v1(1468,116.27) ; v1(1939.48,149.61) U4.34
  BOTTOM w7.87: v1(1468,116.27) 1501.35,149.61 v1@1942.49,149.61
NetR25_2: R25.2 U1.100 | length 104.2
  TOP w7.87: R25.2 776.83,1106.9 U1.100
NetR26_1: R26.1 U9.4 | length 42.8
  TOP w7.87: R26.1 1157.07,304.8 U9.4
NetR27_1: R27.1 U9.3 | length 52.6
  TOP w7.87: R27.1 1218.44,307.78 U9.3
NetR28_1: R28.1 U9.1 | length 126.5
  TOP w7.87: U9.1 1275,302.39 1275,245.73 R28.1@1322,198.73
RESET: C4.2 R2.2 U1.99 | length 159.9
  TOP w7.87: R2.2@759.73,1211 759.73,1166.27 803.4,1122.6 U1.99
SDC0_CLK: TF_CARD1.5 U1.105 | length 663.5
  TOP w7.87: TF_CARD1.5@637.01,1175.59 554.59,1175.59 528,1149 528,984.97 567.53,945.44 695.49,945.44 778.15,1028.1 U1.105
SDC0_CMD: TF_CARD1.3 U1.103 | length 545.2
  TOP w7.87: TF_CARD1.3@637.01,1088.98 564.98,1088.98 547,1071 547,985.46 573.24,959.22 689.78,959.22 790.16,1059.6 U1.103
SDC0_D0: TF_CARD1.7 U1.106 | length 794.3
  TOP w7.87: TF_CARD1.7@637.01,1262.2 535.2,1262.2 508,1235 508,985.49 561.83,931.66 701.2,931.66 781.94,1012.4 U1.106
SDC0_D1: TF_CARD1.8 U1.107 | length 874.9
  TOP w7.87: TF_CARD1.8@637.01,1305.51 530.51,1305.51 486,1261 486,988 556.12,917.88 706.91,917.88 785.63,996.6 U1.107
SDC0_D2: TF_CARD1.1 U1.101 | length 256.5
  TOP w7.87: TF_CARD1.1@637.01,1002.36 693.95,1002.36 782.69,1091.1 U1.101
SDC0_D3: TF_CARD1.2 U1.102 | length 462.6
  TOP w7.87: TF_CARD1.2@637.01,1045.67 581.67,1045.67 563,1027 563,988.95 578.95,973 684.08,973 786.48,1075.4 U1.102
SDC1_CLK: U1.5 U4.17 | length 733.5
  TOP w7.87: U1.5 975.84,609.86 975.84,580.08 999.91,556 1207,556 1339,424 v1(1352,424) ; v1(1425,326.78) U4.17
  BOTTOM w7.87: v1(1352,424) 1388,424 1425,387 v1(1425,326.78)
SDC1_CMD: R20.2 U1.4 U4.16 | length 836.4
  TOP w7.87: U1.4 959.1,575.55 993.65,541 1199.72,541 1378.51,362.21 1418,362.21 ; R20.2 1373,462 1418,417 1418,362.21 ; U4.16 1418,362.21
SDC1_D0: U1.3 U4.18 | length 749.8
  TOP w7.87: U1.3 943.4,571.76 987.94,527.22 1194.01,527.22 1429.89,291.35 U4.18
SDC1_D1: U1.2 U4.19 | length 782.4
  TOP w7.87: U1.2 927.7,567.98 982.24,513.44 1188.31,513.44 1445.83,255.91 U4.19
SDC1_D2: U1.1 U4.14 | length 1009.9
  TOP w7.87: U1.1 911.9,564.29 976.53,499.66 1182.6,499.66 1449.26,233 v1(1478,233) ; v1(1478,433.08) U4.14
  BOTTOM w7.87: v1(1478,233) v1(1478,433.08)
SDC1_D3: U1.128 U4.15 | length 1118.9
  TOP w7.87: U1.128 856.8,599.9 970.82,485.88 1176.89,485.88 1445,217.77 v1(1445,201) ; v1(1445,397.65) U4.15
  BOTTOM w7.87: v1(1445,201) v1(1445,397.65)
SPI_CS: P1.8 U1.54 | length 637.4
  TOP w7.87: U1.54 1495.6,996.6 1516,1017 v1(1528,1017)
  BOTTOM w7.87: v1@1523,1017 1576.97,1017 1701,892.97 1701,739 1665.24,703.24 P1.8@1543,703.24
SPI_MISO: U1.52
SPI_MOSI: P1.10 U1.55 | length 633.3
  TOP w7.87: v1(1395,992) 1415.4,1012.4 U1.55
  BOTTOM w7.87: v1(1395,992) 1395,972 1410,957 1598,957 1670,885 1670,787 1649.24,766.24 P1.10@1543,766.24
SPI_SCLK: P1.9 U1.53 | length 559.7
  TOP w7.87: U1.53 v1(1520.1,980.9)
  BOTTOM w7.87: v1@1520.1,976.9 v1(1520.1,980.9) 1593.59,980.9 1686,888.49 1686,752 1668.74,734.74 P1.9@1543,734.74
SVREF: C5.1 C6.2 R3.1 R4.2 U1.63 U1.71 | length 649
  TOP w7.87: U1.71 1305.6,1247.6 1317,1259 v1(1446,1259) ; U1.63 1493.3,1138.3 1525,1170 v1(1525,1240.94) 1591.06,1307 C5.1 ; C6.2 C5.1 ; R4.2 R3.1 C5.1
  BOTTOM w7.87: v1(1446,1259) 1506.94,1259 v1(1525,1240.94)
SZQ: R9.2 U1.73 | length 267.8
  TOP w7.87: U1.73 1274.1,1246.1 1307,1279 1412,1279 1451,1318 R9.2
UART2_RX: U1.40 U4.42 | length 748.3
  TOP w7.87: U1.40 1580.9,776.1 1670,687 v1(1762,687) v1@1762,689.56 ; v1(1939.48,433.08) U4.42
  BOTTOM w7.87: v1@1761,687 v1@1761,688.56 ; v1(1762,687) 1762,610.56 v1(1939.48,433.08) ; v1@1940.98,434.58 v1@1942.49,433.08
UART2_TX: U1.39 U4.43 | length 708.2
  TOP w7.87: U1.39 1574.6,760.4 1668,667 v1(1792,667) ; v1(1939.48,468.51) U4.43
  BOTTOM w7.87: v1(1792,667) 1792,615.99 v1(1939.48,468.51) ; v1@1940.98,470.02 v1@1942.49,468.51
USART0_RX: R17.2 U1.49 U5.1 | length 343.3
  TOP w7.87: U1.49 1508.1,917.9 1608.73,817.27 1644,817.27 1646,815.27 1668.67,792.6 U5.1 ; 1615.33,817.27 cw(c1615.33,783.56) R17.2@1639.16,807.4 ; R17.2@1634.34,817.27 cw(c1634.34,802.57) R17.2@1644.73,812.96 ; R17.2@1647.97,805.38 cw(c1647.97,786.25) 1661.49,799.78 ; R17.2@1654.86,812.27 ccw(c1669,812.27) 1659,802.27
USART0_TX: R16.2 U1.48 U6.1 | length 513.4
  TOP w7.87: U1.48 1502.9,902.1 1642,763 1784.81,763 U6.1 1798.67,787.6 ; R16.2 1798.67,787.6 ; R16.2@1775.97,805.38 cw(c1775.97,793.5) R16.2@1784.37,801.9 ; R16.2@1782.86,812.27 ccw(c1804.24,812.27) 1789.12,797.15 ; 1801.14,779.33 cw(c1809.41,771.06) U6.1@1809.41,782.76 ; U6.1@1807.93,783.42 ccw(c1798.67,775.24) 1798.67,787.6
USB_DM: J3.5 J3.7 U1.110 | length 995.2
  TOP w7.87: J3.7@309.22,460.16 v1(365.84,460.16) ; J3.5@309.22,499.53 v1(365.84,499.53) 387.53,499.53 403.61,515.61 403.61,784.97 403.22,785.36 403.22,796.78 498.44,892 700.51,892 757.91,949.4 U1.110
  BOTTOM w7.87: v1(365.84,460.16) v1(365.84,499.53)
USB_DP: J3.6 J3.8 U1.111 | length 1054.1
  TOP w7.87: J3.8@309.22,440.47 398.47,440.47 417,459 417,479.84 ; J3.6@309.22,479.84 417,479.84 ; U1.111 761.6,933.6 706.22,878.22 504.15,878.22 417.39,791.46 417.39,480.24 417,479.84
VHP_BP: U1.123
VRA1: C3.2 U1.117 | length 113.9
  TOP w7.87: C3.2 768.73,802.73 805.1,839.1 U1.117
VRA2: C2.2 R1.2 U1.118 | length 169.5
  TOP w7.87: R1.2 768.73,749.76 C2.2 797,778.91 797,805 815.4,823.4 U1.118
VRTC: R6.1 U1.98 | length 174.5
  TOP w7.87: R6.1 802,1209.73 802,1158 821.7,1138.3 U1.98
VRTC_IO: C1.1 U1.97 | length 179.5
  TOP w7.87: C1.1 856.8,1225.6 U1.97
X24MIN: C12.1 U1.75 Y2.1 | length 207.4
  TOP w7.87: C12.1 1187.73,1327.53 Y2.1@1242.6,1327.53 ; Y2.1@1238.96,1335.27 1242.6,1331.63 Y2.1@1242.6,1327.53 ; U1.75 Y2.1@1242.6,1327.53 ; Y2.1 Y2.1@1242.6,1327.53
X24MOUT: C16.1 U1.74 Y2.3 | length 290.7
  TOP w7.87: U1.74 1258.4,1269.42 1291,1302.02 1291,1352.16 Y2.3 1381.27,1394.47 C16.1@1400,1375.73
pads on no net: J3.3 J3.4 J3.9 J3.10 J4.2 J5.3 J5.4 J5.9 J5.10 TF_CARD1.0@205.24,970.87 TF_CARD1.0@205.24,1285.83 TF_CARD1.9 U1.6 U1.7 U1.9 U1.10 U1.11 U1.13 U1.14 U1.15 U1.16 U1.17 U1.18 U1.22 U1.23 U1.24 U1.27 U1.28 U1.30 U1.31 U1.32 U1.33 U1.34 U1.35 U1.36 U1.37 U1.41 U1.45 U1.46 U1.77 U1.78 U1.81 U1.82 U1.83 U1.84 U1.86 U1.87 U1.89 U1.90 U1.91 U1.92 U1.112 U1.119 U1.124 U1.125 U4.4 U4.5 U4.6 U4.7 U4.8 U4.10 U4.11 U4.21 U4.23 U4.24 U4.25 U4.26 U4.27 U4.28 U4.29 U4.30 U4.32 U4.35 U4.37 U4.38 U4.39 U4.40 U5.3 U6.3 U7.4 U7.5 U7.6

## Polygon pours and split planes (outlines as drawn)
GND on TOP "TOP-No Net" (hatched 90Degree grid 3.94 track 3.94, remove dead copper, pour order 1000): 0,0 2086.61,0 2086.61,1456.69 0,1456.69
GND on BOTTOM "TOP-No Net" (hatched 90Degree grid 3.94 track 3.94, remove dead copper, pour order 1000): 0,0 2086.61,0 2086.61,1456.69 0,1456.69

## Keep-outs
Keep-Out Layer:
  the board outline again, w7.87

## Other copper
TOP:
  region net +3.3V: 609,113 527,113 518,122 474,122 463,133 374,133 365,124 308,124 265,81 218,81 214,77 214,38 217,35 260,35 276,51 398,51 430,83 603,83 610,90 610,112
  region net +1.8V: 767,347 810,347 839,318 839,183 802,146 779,146 776,149 776,179 771,184 771,237 759,249 759,339
  region net +1.2V: 480,547 501,568 749,568 755,562 755,511 750,506 614,506 602,518 559,518 553,524 480,524
  region net NetL1_2: 468,290 378,200 378,185 381,182 452,182 456,186 456,201 524,269 524,290
  region net NetL3_1: 612,290 646,290 688,332 730,332 731,331 731,252 669,252 645,276 616,276 612,280
  region net NetL2_1: 595,361 595,406 620,431 620,473 623,476 697,476 699,474 699,440 683,440 604,361
  region net +5V: 265,576 353,576 360,583 386,583 389,580 389,539 385,535 365,535 347,553 339,553
  region net +5V: 266,387 372,387 393,366 393,347 406,334 446,334 451,329 451,308 426,283 399,283 399,298 361,336 361,355 352,364 342,364
  pour cut-out: 1880,698 1880,587 1878,585 2085,585 2086,586 2086,695 2083,698
BOTTOM:
  pour cut-out: 1880,698 1880,587 1878,585 2085,585 2086,586 2086,695 2083,698

## Text inside footprints (layer, text, board x,y; h text height)
TF_CARD1: Top Overlay "Cd" at 572.62,1361.36 h15.75 r180; Top Overlay "8" at 550.62,1308.36 h15.75 r270; Top Overlay "7" at 549.62,1264.36 h15.75 r270; Top Overlay "6" at 549.62,1222.36 h15.75 r270; Top Overlay "5" at 549.62,1180.36 h15.75 r270; Top Overlay "4" at 548.62,1138.36 h15.75 r270; Top Overlay "3" at 548.62,1091.36 h15.75 r270; Top Overlay "2" at 548.62,1049.36 h15.75 r270; Top Overlay "1" at 547.62,1006.36 h15.75 r270